# Altium PCB v1_ecg_board.PcbDoc
Units mm, origin at the board's own origin, x right, y up, seen from the top; angles counter-clockwise.
Board outline 26.97 x 70.99 mm, 2 copper layers (Top Layer, Bottom Layer), stack 1.671 mm thick; 39 components, 28 nets, 183 pads, 7 vias.
Unrouted connection lines stored in the file: 1.
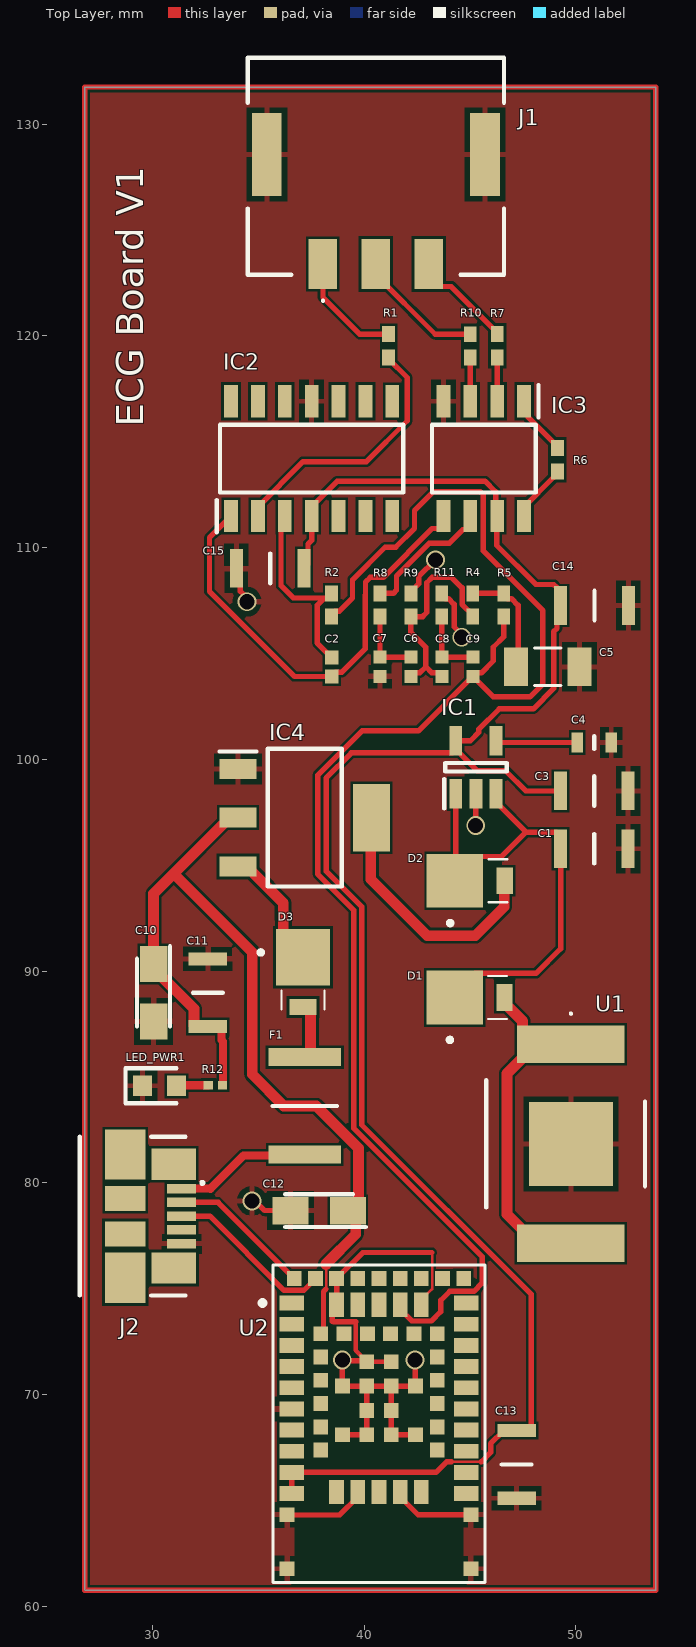
[diagram p0: Top Layer view]
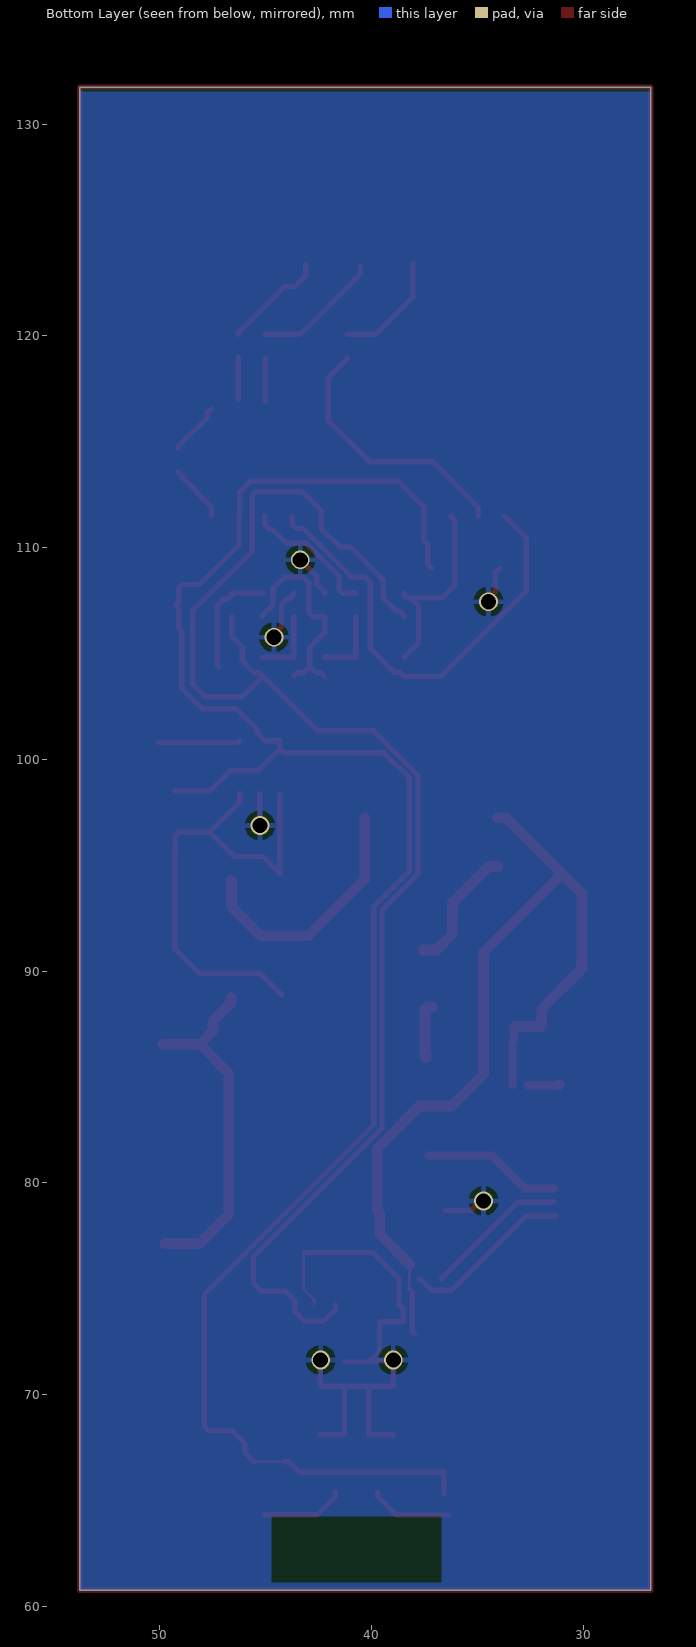
[diagram p1: Bottom Layer view, seen from below]
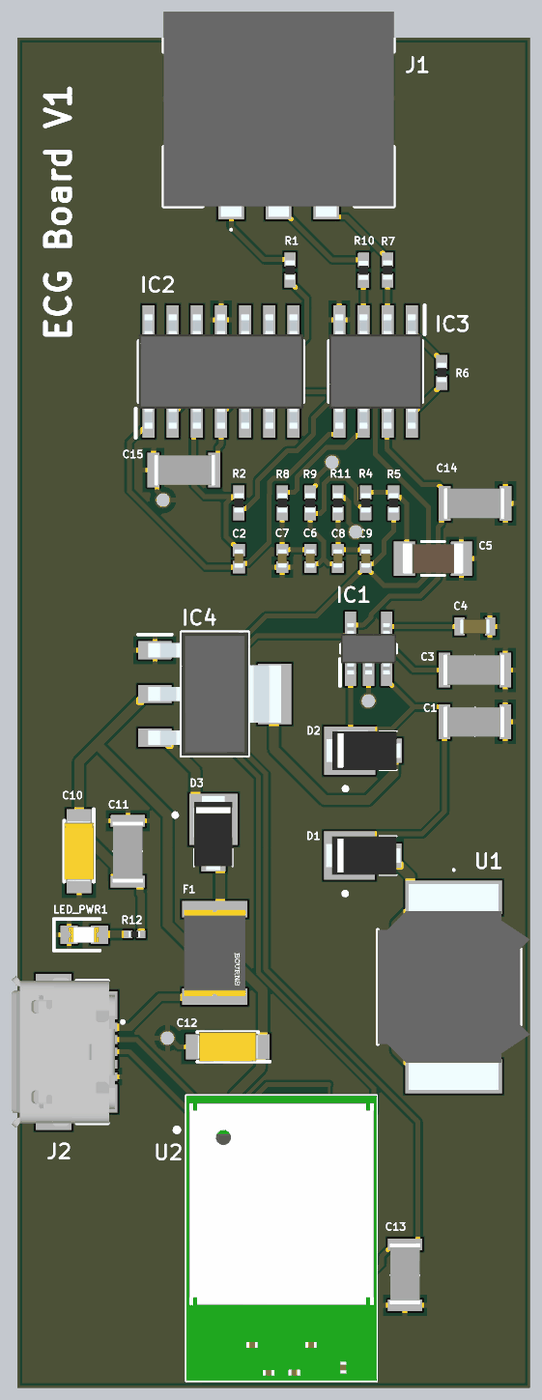
[diagram p2: 3D render of the assembled board from above, using the file's embedded part models]

## Layer stack, top to bottom
Board Layer Stack Top Solder: solder mask 0.0102, SM-001, Dk 3.5
Top Layer: signal copper 0.0356
Dielectric 1: dielectric 1.6002, FR-4, Dk 4.8
Bottom Layer: signal copper 0.0356
Board Layer Stack Bottom Solder: solder mask 0.0102, SM-001, Dk 3.5

## Board outline
26.797,60.757 26.797,131.75 53.772,131.75 53.772,60.757

## Design rules (kind name [scope] priority, off if disabled: settings)
Clearance [All] p1: gap=0.127 ignorepadtopadclearanceinfootprint=FALSE except(0: Arc-Hole Track-Hole SMDPad-Hole THPad-Hole Via-Hole Fill-Hole Poly-Hole Region-Hole Text-Hole; 0.076: Arc-SMDPad Track-SMDPad)
PolygonConnect [All] p1: connectstyle=Relief reliefconductorwidth=0.254 reliefentries=4 polygonreliefangle="90 Angle" airgapwidth=0.254
RoomDefinition instrumentation_amplifier [InComponentClass('instrumentation_amplifier')] p1: confinementstyle=ConfineIn formatcopy=TRUE lockcomponents=FALSE outline 0,0 50.8,0 50.8,25.4 0,25.4
RoutingVias [All] p1: holewidth=0.711 width=1.27 viastyle="Through Hole" minholewidth=0.711 minwidth=1.27 maxholewidth=0.711 maxwidth=1.27
SolderMaskExpansion [All] p1: expansion=0.102 istentingtop=FALSE
Width [All] p1: maxlimit=0.508 minlimit=0.127 preferedwidth=0.254 bottomlayer_minwidth=0.254 bottomlayer_maxwidth=0.254 minimp=50.000000 maximp=50.000000 favimp=50.000000
30 further rules are at their usual default settings.

## Components (designator, comment, footprint, x,y, rotation, side; value= is the part's Value field where it differs from the comment)
C1 "1uF" CAPC3216X180N 50.863,95.777 r0 top
C2 "100pF" CAPC1005X56N 38.456,104.361 r90 top
C3 "1uF" CAPC3216X180N 50.863,98.505 r0 top
C4 "1uF" CAPC1608X90N 50.863,100.793 r0 top
C5 "0.05 uF" CAPC3216X94N 48.666,104.369 r180 top
C6 "0.1 uF" CAPC1005X55N 42.215,104.369 r90 top
C7 "0.1 uF" CAPC1005X55N 40.742,104.369 r90 top
C8 "0.1 uF" CAPC1005X55N 43.666,104.369 r270 top
C9 "0.1 uF" CAPC1005X55N 45.128,104.369 r90 top
C10 "10uF" CAPPM3216X180N 30.048,88.976 r270 top
C11 "1uF" CAPC3216X180N 32.614,88.976 r90 top
C12 "10uF" CAPPM3216X180N 37.871,78.689 r180 top
C13 "1uF" CAPC3216X180N 47.193,66.7 r270 top
C14 "1uF" CAPC3216X180N 50.876,107.264 r0 top
C15 "1uF" CAPC3216X180N 35.56,109.017 r180 top
D1 "SS1P3L-M3_84A" SS1P3LM384A 44.272,88.748 r0 top
D2 "SS1P3L-M3_84A" SS1P3LM384A 44.284,94.265 r0 top
D3 "SS1P3L-M3_84A" SS1P3LM384A 37.109,90.653 r270 top
F1 "MF-MSMF050-2" FUSC4632X85N 37.19,83.629 r270 top
IC1 "TC1185-3.3VCT713" SOT95P270X145-5N 45.275,99.624 r90 top
IC2 "AD8609ARZ-REEL7" SOIC127P600X175-14N 37.516,114.198 r90 top
IC3 "AD627BRZ-R7" SOIC127P600X175-8N 45.644,114.198 r270 top
IC4 "REG1117-5" SOT230P700X180-4N 37.19,97.244 r0 top
J1 "215932-0370" 2159320370 40.549,128.008 r180 top
J2 "Micro_USB_B" 47346-0001 26.563,78.424 r90 top
LED_PWR1 "Green_LED" LEDC1608X55N 30.328,84.582 r0 top
R1 "470kR" RESC1005X40N 41.148,119.532 r90 top
R2 "10kR" RESC1005X40N 38.456,107.29 r90 top
R4 "26kR" RESC1005X40N 45.128,107.29 r90 top
R5 "26kR" RESC1005X40N 46.59,107.29 r270 top
R6 "10kR" RESC1005X40N 49.124,114.148 r270 top
R7 "470kR" RESC1005X40N 46.279,119.532 r270 top
R8 "10kR" RESC1005X40N 40.742,107.29 r270 top
R9 "160kR" RESC1005X40N 42.204,107.29 r270 top
R10 "470kR" RESC1005X40N 45.009,119.524 r270 top
R11 "13K" RESC1005X40N 43.666,107.29 r90 top
R12 "1kR" RESC0603X26N 32.969,84.607 r0 top
U1 "2998" 2998 49.759,81.839 r270 top
U2 "NINA-B306" NINA_LGA71R_1500X1000X223_PCB 40.696,68.623 r270 top

## Footprints (in the part's own frame and the unit in brackets; to place one, negate y for a bottom-side part, rotate by r counter-clockwise, add the part's x,y. Pads: shape width x height; smd on the part's side, far side on the other; paste and mask are expansions set on the pad)
2998 [mm]
  rect 1.78x5.08 smd: 1(-4.7,0) 2(4.7,0)
  rect 3.96x3.96 smd: 3(0,0)
  silkscreen extent -6.2,-4 3,3.5, body extent -5.41,-4 5.41,4, height 3.28
47346-0001 [mm]
  rect 0.45x1.38 smd: 1(1.3,-4.81) 2(0.65,-4.81) 3(0,-4.81) 4(-0.65,-4.81) 5(-1.3,-4.81)
  rect 1.475x2.1 smd: 6(-2.452,-4.45) 7(2.452,-4.45)
  rect 1.175x1.9 smd: 8(0.837,-2.15) 9(-0.837,-2.15)
  rect 2.375x1.9 smd: 10(2.913,-2.15) 11(-2.913,-2.15)
  silkscreen extent -3.75,-5.84 3.75,0, body extent -3.99,-5.38 3.99,0.05, height 2.7
2159320370 [mm]
  rect 1.35x2.38 smd: 1(2.5,4.615) 2(0,4.615) 3(-2.5,4.615)
  rect 1.4x3.92 smd: MP1(5.15,-0.555) MP2(-5.15,-0.555)
  silkscreen extent -6.05,-5.13 6.05,6.4, body extent -6.05,-5.13 6.05,5.67, height 7.6
CAPC1005X55N [mm]
  rect 0.6x0.62 smd: 1(-0.46,0) 2(0.46,0)
  body extent -0.5,-0.25 0.5,0.25, height 0.55
CAPC1005X56N [mm]
  rect 0.65x0.64 smd: 1(-0.45,0) 2(0.45,0)
  body extent -0.5,-0.25 0.5,0.25, height 0.56
CAPC1608X90N [mm]
  rect 0.54x0.94 smd: 1(-0.8,0) 2(0.8,0)
  silkscreen extent 0,-0.3 0,0.3, body extent -0.8,-0.4 0.8,0.4, height 0.9
CAPC3216X94N [mil]
  rect 44x71 smd: 1(-59,0) 2(59,0)
  silkscreen extent -24,-35 24,35, body extent -63,-31 63,31, height 37
CAPC3216X180N [mm]
  rect 0.62x1.82 smd: 1(-1.6,0) 2(1.6,0)
  silkscreen extent 0,-0.7 0,0.7, body extent -1.65,-0.8 1.55,0.8, height 1.6
CAPPM3216X180N [mm]
  rect 1.7x1.3 smd: 1(-1.35,0) 2(1.35,0)
  silkscreen extent -2.2,-0.77 1.6,0.77, body extent -1.6,-0.77 1.6,0.77, height 1.8
FUSC4632X85N [mm]
  rect 0.85x3.43 smd: 1(-2.3,0) 2(2.3,0)
  silkscreen extent 0,-1.52 0,1.52, body extent -2.27,-1.62 2.27,1.62, height 0.85
LEDC1608X55N [mm]
  rect 0.9x0.95 smd: 1(-0.8,0) 2(0.8,0)
  silkscreen extent -1.6,-0.82 0.8,0.82, body extent -0.83,-0.4 0.77,0.4, height 0.55
NINA_LGA71R_1500X1000X223_PCB [mm] "Stand-alone Bluetooth low energy module"
  rect 0.7x1.15 smd paste+0 mask+0.05: 1(-5.7,-4.125) 2(-4.7,-4.125) 3(-3.7,-4.125) 4(-2.7,-4.125) 5(-1.7,-4.125) 6(-0.7,-4.125) 7(0.3,-4.125) 8(1.3,-4.125) 9(2.3,-4.125) 10(3.3,-4.125) 16(3.3,4.125) 17(2.3,4.125) 18(1.3,4.125) 19(0.3,4.125) 20(-0.7,4.125) 21(-1.7,4.125) 22(-2.7,4.125) 23(-3.7,4.125) 24(-4.7,4.125) 25(-5.7,4.125)
  rect 1.15x0.7 smd paste+0 mask+0.05: 11(3.225,-2) 12(3.225,-1) 13(3.225,0) 14(3.225,1) 15(3.225,2) 26(-5.625,2) 27(-5.625,1) 28(-5.625,0) 29(-5.625,-1) 30(-5.625,-2)
  rect 0.7x0.7 smd paste+0 mask+0.05: 31(-4.25,-2.75) 32(-3.15,-2.75) 33(-2.05,-2.75) 34(-0.95,-2.75) 35(0.15,-2.75) 36(1.25,-2.75) 37(1.25,2.75) 38(0.15,2.75) 39(-0.95,2.75) 40(-2.05,2.75) 41(-3.15,2.75) 42(-4.25,2.75) 43(-4.25,1.65) 44(-4.25,0.55) 45(-4.25,-0.55) 46(-4.25,-1.65) 47(-6.85,4) 48(-6.85,3) 49(-6.85,2) 50(-6.85,1) 51(-6.85,0) 52(-6.85,-1) 53(-6.85,-2) 54(-6.85,-3) 55(-6.85,-4) 56(-2.925,-0.575) 57(-2.925,0.575) 58(-1.775,-1.725) 59(-1.775,-0.575) 60(-1.775,0.575) 61(-1.775,1.725) 62(-0.625,-0.575) 63(-0.625,0.575) 64(0.525,-1.725) 65(0.525,-0.575) 66(0.525,0.575) 67(0.525,1.725) 68(4.3,-4.35) 69(6.85,-4.35) 70(6.85,4.35) 71(4.3,4.35)
  Multi-Layer pour cut-out: 4.4,4 7.5,4 7.5,-4 4.4,-4
  silkscreen extent -7.5,-5.6 7.5,5, body extent -7.5,-5 7.5,5, height 2.31
RESC0603X26N [mm]
  rect 0.44x0.42 smd: 1(-0.34,0) 2(0.34,0)
  body extent -0.3,-0.15 0.3,0.15, height 0.26
RESC1005X40N [mm]
  rect 0.75x0.6 smd: 1(-0.55,0) 2(0.55,0)
  body extent -0.5,-0.25 0.5,0.25, height 0.4
SOIC127P600X175-8N [mm]
  rect 1.525x0.65 smd: 1(-2.712,1.905) 2(-2.712,0.635) 3(-2.712,-0.635) 4(-2.712,-1.905) 5(2.712,-1.905) 6(2.712,-0.635) 7(2.712,0.635) 8(2.712,1.905)
  silkscreen extent -3.47,-2.45 1.6,2.58, body extent -3,-2.45 3,2.45, height 1.75
SOIC127P600X175-14N [mm]
  rect 1.525x0.65 smd: 1(-2.712,3.81) 2(-2.712,2.54) 3(-2.712,1.27) 4(-2.712,0) 5(-2.712,-1.27) 6(-2.712,-2.54) 7(-2.712,-3.81) 8(2.712,-3.81) 9(2.712,-2.54) 10(2.712,-1.27) 11(2.712,0) 12(2.712,1.27) 13(2.712,2.54) 14(2.712,3.81)
  silkscreen extent -3.47,-4.33 1.6,4.48, body extent -3,-4.33 3,4.33, height 1.75
SOT95P270X145-5N [mm]
  rect 1.4x0.6 smd: 1(-1.25,0.95) 2(-1.25,0) 3(-1.25,-0.95) 4(1.25,-0.95) 5(1.25,0.95)
  silkscreen extent -1.95,-1.45 0.2,1.5, body extent -1.35,-1.45 1.35,1.45, height 1.45
SOT230P700X180-4N [mm]
  rect 1.75x0.95 smd: 1(-3.15,2.3) 2(-3.15,0) 3(-3.15,-2.3)
  rect 1.75x3.2 smd: 4(3.15,0)
  silkscreen extent -4.03,-3.25 1.75,3.25, body extent -3.5,-3.25 3.5,3.25, height 1.8
SS1P3LM384A [mm]
  rect 2.67x2.54 smd: 1(0,0)
  rect 0.762x1.27 smd: 2(2.351,0)
  silkscreen extent -0.33,-2.1 2.47,1.01, body extent -1.22,-1.02 2.68,1.02, height 1.15

## Part data
C1 C3 C11 C13 C14 C15: library part C3216X7R1H105K160AE, "Capacitor", Manufacturer_Name=TDK, Mouser Part Number=810-C3216X7R1H105KST, Arrow Part Number=C3216X7R1H105K160AE, Arrow Price/Stock=https://www.arrow.com/en/products/c3216x7r1h105k160ae/tdk?region=nac, Datasheet Link=https://product.tdk.com/info/en/catalog/datasheets/mlcc_commercial_midvoltage_en.pdf, Height=1.8mm, Manufacturer_Part_Number=C3216X7R1H105K160AE, Mouser Price/Stock=https://www.mouser.co.uk/ProductDetail/TDK/C3216X7R1H105K160AE?qs=LcTL%2F5vFEzHWgMW0Em18fQ%3D%3D
C2: library part 04025A101JAT2A, "Capacitor", Manufacturer_Name=AVX, Mouser Part Number=581-04025A101J, Arrow Part Number=04025A101JAT2A, Arrow Price/Stock=https://www.arrow.com/en/products/04025a101jat2a/avx, Datasheet Link=http://www.mouser.com/catalog/supplier/library/pdf/AVXSurfaceMountCeramic.pdf, Height=0.56mm, Manufacturer_Part_Number=04025A101JAT2A, Mouser Price/Stock=https://www.mouser.co.uk/ProductDetail/AVX/04025A101JAT2A?qs=MeUoP7zHHrVUMjmeFYUrCw%3D%3D
C4: library part CGA1A2X7R1H471K030BA, "Capacitor", Manufacturer_Name=TDK, Mouser Part Number=810-CGA1A2X7R1H471KA, Arrow Part Number=CGA1A2X7R1H471K030BA, Arrow Price/Stock=https://www.arrow.com/en/products/cga1a2x7r1h471k030ba/tdk?region=europe, Datasheet Link=https://product.tdk.com/system/files/dam/doc/product/capacitor/ceramic/mlcc/catalog/mlcc_automotive_general_en.pdf, Height=0.9mm, Manufacturer_Part_Number=CGA1A2X7R1H471K030BA, Mouser Price/Stock=https://www.mouser.co.uk/ProductDetail/TDK/CGA1A2X7R1H471K030BA?qs=2FIyTMJ0hNm9jc1ZvmiYZg%3D%3D
C5: library part 12065C503JAT2A, "Capacitor", Manufacturer_Name=AVX, Mouser Part Number=581-12065C503JAT2A, Arrow Part Number=12065C503JAT2A, Arrow Price/Stock=https://www.arrow.com/en/products/12065c503jat2a/avx, Manufacturer_Part_Number=12065C503JAT2A, Mouser Price/Stock=https://www.mouser.co.uk/ProductDetail/AVX/12065C503JAT2A?qs=KpoduxKdAk0Ka0q%2FwvgHUg%3D%3D
C6 C7 C8 C9: library part CL05A104KA5NNNC, "Capacitor", Manufacturer_Name=SAMSUNG, Mouser Part Number=187-CL05A104KA5NNNC, Arrow Part Number=CL05A104KA5NNNC, Arrow Price/Stock=https://www.arrow.com/en/products/cl05a104ka5nnnc/samsung-electro-mechanics?region=europe, Datasheet Link=https://datasheet.datasheetarchive.com/originals/distributors/Datasheets-DGA10/2409293.pdf, Height=0.55mm, Manufacturer_Part_Number=CL05A104KA5NNNC, Mouser Price/Stock=https://www.mouser.co.uk/ProductDetail/Samsung-Electro-Mechanics/CL05A104KA5NNNC?qs=X6jEic%2FHinDlkqz9npJeOg%3D%3D
C10 C12: library part TAJA106K010RNJV, "Capacitor Polarised", Manufacturer_Name=AVX, Mouser Part Number=581-TAJA106K010RNJV, Arrow Part Number=TAJA106K010RNJV, Arrow Price/Stock=https://www.arrow.com/en/products/taja106k010rnjv/avx, Datasheet Link=http://www.farnell.com/datasheets/1680476.pdf, Height=1.8mm, Manufacturer_Part_Number=TAJA106K010RNJV, Mouser Price/Stock=https://www.mouser.co.uk/ProductDetail/AVX/TAJA106K010RNJV?qs=q%252BHV0zBR8MhA8vzi7uQCHA%3D%3D
D1 D2 D3: "Schottky Diode", Arrow Part Number=SS1P3L-M3/84A, Manufacturer_Name=Vishay, Mouser Part Number=625-SS1P3L-M3/84A, Arrow Price/Stock=https://www.arrow.com/en/products/ss1p3l-m384a/vishay?region=nac, Datasheet Link=https://ms.componentsearchengine.com/Datasheets/2/SS1P3L-M3_84A.pdf, Height=1.15mm, Manufacturer_Part_Number=SS1P3L-M3/84A, Mouser Price/Stock=https://www.mouser.co.uk/ProductDetail/Vishay-General-Semiconductor/SS1P3L-M3-84A?qs=HSPD0Bff7iZtYrbeCvAZDQ%3D%3D
F1: "Fuse", Manufacturer_Name=Bourns, Mouser Part Number=652-MF-MSMF050-2, Arrow Part Number=MF-MSMF050-2, Arrow Price/Stock=https://www.arrow.com/en/products/mf-msmf050-2/bourns?region=europe, Datasheet Link=https://www.bourns.com/pdfs/mfmsmf.pdf, Manufacturer_Part_Number=MF-MSMF050-2, Mouser Price/Stock=https://www.mouser.co.uk/ProductDetail/Bourns/MF-MSMF050-2?qs=t3shhpq1i1DZ7OBD5kLNoA%3D%3D
IC1: "Integrated Circuit", Manufacturer_Name=Microchip, Mouser Part Number=579-TC1185-3.3VCT713, Arrow Part Number=TC1185-3.3VCT713, Arrow Price/Stock=https://www.arrow.com/en/products/tc1185-3.3vct713/microchip-technology?region=nac, Datasheet Link=https://datasheet.datasheetarchive.com/originals/distributors/SFDatasheet-4/sf-00090228.pdf, Height=1.45mm, Manufacturer_Part_Number=TC1185-3.3VCT713, Mouser Price/Stock=https://www.mouser.co.uk/ProductDetail/Microchip-Technology-Atmel/TC1185-3.3VCT713?qs=L7mmR9vWTYjv9mdvONI4tQ%3D%3D
IC2: "Integrated Circuit", Manufacturer_Name="Analog Devices", Mouser Part Number=584-AD8609ARZ-R7, Arrow Part Number=AD8609ARZ-REEL7, Arrow Price/Stock=https://www.arrow.com/en/products/ad8609arz-reel7/analog-devices, Datasheet Link=https://www.analog.com/media/en/technical-documentation/data-sheets/AD8603_8607_8609.pdf, Height=1.75mm, Manufacturer_Part_Number=AD8609ARZ-REEL7, Mouser Price/Stock=https://www.mouser.com/Search/Refine.aspx?Keyword=584-AD8609ARZ-R7
IC3: "Integrated Circuit", Manufacturer_Name="Analog Devices", Mouser Part Number=584-AD627BRZ-R7, Arrow Part Number=AD627BRZ-R7, Arrow Price/Stock=https://www.arrow.com/en/products/ad627brz-r7/analog-devices, Datasheet Link=https://www.analog.com/media/en/technical-documentation/data-sheets/AD627.pdf, Height=1.75mm, Manufacturer_Part_Number=AD627BRZ-R7, Mouser Price/Stock=https://www.mouser.co.uk/ProductDetail/Analog-Devices/AD627BRZ-R7?qs=NmRFExCfTkFC5ODcpQAx7A%3D%3D
IC4: "Integrated Circuit", Manufacturer_Name="Texas Instruments", Mouser Part Number=595-REG1117-5, Arrow Part Number=REG1117-5, Arrow Price/Stock=https://www.arrow.com/en/products/reg1117-5/texas-instruments?region=nac, Datasheet Link=http://www.ti.com/lit/gpn/reg1117, Height=1.8mm, Manufacturer_Part_Number=REG1117-5, Mouser Price/Stock=https://www.mouser.co.uk/ProductDetail/Texas-Instruments/REG1117-5?qs=sSOk4GDDv7yzZiRJiNDqvA%3D%3D
J1: "Connector", Manufacturer_Name=Molex, Mouser Part Number=538-215932-0370, Datasheet Link=https://www.molex.com/pdm_docs/sd/2159320370_sd.pdf, Height=7.5mm, Manufacturer_Part_Number=215932-0370, Mouser Price/Stock=https://www.mouser.co.uk/ProductDetail/Molex/215932-0370?qs=t7xnP681wgWm2CraYd21hQ%3D%3D
J2: library part 47346-0001, "Connector", Manufacturer_Name=Molex, Mouser Part Number=538-47346-0001, Datasheet Link=http://www.molex.com/pdm_docs/sd/473460001_sd.pdf, Manufacturer_Part_Number=47346-0001, Mouser Price/Stock=https://www.mouser.co.uk/ProductDetail/Molex/47346-0001?qs=c2CV6XM0DweJBWaSeyWeCw%3D%3D
LED_PWR1: library part LTST-C191KGKT, "LED", Manufacturer_Name=Lite-On, Mouser Part Number=859-LTST-C191KGKT, Arrow Part Number=LTST-C191KGKT, Arrow Price/Stock=https://www.arrow.com/en/products/ltst-c191kgkt/lite-on-technology?region=nac, Datasheet Link=http://www.mouser.com/ds/2/239/S_110_LTST-C191KGKT-369560.pdf, Height=0.55mm, Manufacturer_Part_Number=LTST-C191KGKT, Mouser Price/Stock=https://www.mouser.co.uk/ProductDetail/Lite-On/LTST-C191KGKT?qs=xSPZu9B1aMCRQ5ACasEYAg%3D%3D
R1 R2 R6 R7 R8 R10: library part RC0402JR-0710KL, "Resistor", Manufacturer_Name=KEMET, Mouser Part Number=603-RC0402JR-0710KL, Datasheet Link=https://datasheet.datasheetarchive.com/originals/distributors/Datasheets_SAMA/902f9e387b938f871d31120f5fc1d65e.pdf, Height=0.4mm, Manufacturer_Part_Number=RC0402JR-0710KL, Mouser Price/Stock=https://www.mouser.co.uk/ProductDetail/YAGEO/RC0402JR-0710KL?qs=V1yeUXFNrkk4BhFptVo0Rw%3D%3D
R4 R5: library part RC0402FR-0726K1L, "Resistor", Manufacturer_Name=KEMET, Mouser Part Number=603-RC0402FR-0726K1L, Arrow Part Number=RC0402FR-0726K1L, Arrow Price/Stock=https://www.arrow.com/en/products/rc0402fr-0726k1l/yageo, Datasheet Link=http://www.yageo.com/documents/recent/PYu-RC0402_51_RoHS_L_6_r.pdf, Height=0.4mm, Manufacturer_Part_Number=RC0402FR-0726K1L, Mouser Price/Stock=https://www.mouser.co.uk/ProductDetail/Yageo/RC0402FR-0726K1L?qs=UOUeRUa%252B8WmXNUY%252B%252Bz4L%252Bg%3D%3D
R9: library part RC0402FR-07160KL, "Resistor", Manufacturer_Name=KEMET, Mouser Part Number=603-RC0402FR-07160KL, Arrow Part Number=RC0402FR-07160KL, Arrow Price/Stock=https://www.arrow.com/en/products/rc0402fr-07160kl/yageo, Datasheet Link=http://www.yageo.com/documents/recent/PYu-RC0402_51_RoHS_L_6_r.pdf, Height=0.4mm, Manufacturer_Part_Number=RC0402FR-07160KL, Mouser Price/Stock=https://www.mouser.co.uk/ProductDetail/Yageo/RC0402FR-07160KL?qs=UOUeRUa%252B8WnrOUuDcgqW7w%3D%3D
R11: library part RC0402FR-0713KL, "Resistor", Manufacturer_Name=KEMET, Arrow Part Number=RC0402FR-0713KL, Arrow Price/Stock=https://www.arrow.com/en/products/rc0402fr-0713kl/yageo, Datasheet Link=http://www.yageo.com/documents/recent/PYu-RC0402_51_RoHS_L_6_r.pdf, Height=0.4mm, Manufacturer_Part_Number=RC0402FR-0713KL
R12: library part RC0201FR-071KL, "Resistor", Manufacturer_Name=KEMET, Mouser Part Number=603-RC0201FR-071KL, Datasheet Link=http://www.yageo.com/documents/recent/PYu-RC0201_51_RoHS_L_8.pdf, Height=0.26mm, Manufacturer_Part_Number=RC0201FR-071KL, Mouser Price/Stock=https://www.mouser.co.uk/ProductDetail/YAGEO/RC0201FR-071KL?qs=FLc6udek5PTmPyT6HHV8wg%3D%3D
U1: "Undefined or Miscellaneous", Manufacturer_Name="Keystone Electronics", Mouser Part Number=534-2998, Arrow Part Number=2998, Arrow Price/Stock=https://www.arrow.com/en/products/2998/keystone-electronics, Datasheet Link=https://www.keyelco.com/product-pdf.cfm?p=763, Height=3.18mm, Manufacturer_Part_Number=2998, Mouser Price/Stock=https://www.mouser.co.uk/ProductDetail/Keystone-Electronics/2998?qs=xAjc%252BIZFyb5TvOJRv3Vy6w%3D%3D
U2: "u-blox NINA-B306 Bluetooth 5 LE, 802.15.4 module", Manufacturer=u-blox, Part Description="Stand-alone Bluetooth low energy module"

## Via types
v1: diameter 0.889/0.889 (per signal layer), hole 0.711, Top Layer to Bottom Layer, tented both sides, 7 vias

## Nets (pads, with @x,y where several pads share a name; then routed paths per layer and width w, separated by ;. In a path a pad name is that pad's centre, name@x,y a point inside that pad or via, vN(x,y) a via of type N, cw(c..) or ccw(c..) an arc to the next point about the centre after c; other vN are vias at no path point)
5V_USB: C10.1 C11.1 C12.1 D2.2 IC4.2 IC4.4 R12.2 U2.31 | length 55.7
  Top Layer w0.127: 38.196,74.986 38.202,74.992 38.202,75.971 38.196,75.977 38.196,76.14
  Top Layer w0.254: U2.31 38.075,73.002 38.075,74.865 38.196,74.986
  Top Layer w0.381: C11.1@33.254,87.32 33.254,86.735 33.325,86.665 R12.2@33.325,84.623
  Top Layer w0.508: C10.1@30.074,90.152 C10.1@30.074,90.322 ; 31.025,94.57 34.708,90.887 34.708,85.121 36.2,83.629 37.732,83.629 39.726,81.636 39.726,78.689 39.602,78.565 39.602,77.575 38.196,76.169 38.196,76.14 ; C11.1@32.537,87.376 32.014,87.376 31.958,87.432 31.958,88.217 30.048,90.126 C10.1 30.048,93.652 33.64,97.244 IC4.2 ; C11.1 33.198,87.376 C11.1@33.254,87.32 ; IC4.4@40.31,97.244 40.31,94.336 42.977,91.669 45.237,91.669 46.609,93.04 46.609,94.239 D2.2
GND: C1.2 C3.2 C4.2 C5.1 C7.1 C10.2 C11.2 C12.2 C13.2 C14.2 C15.2 IC1.2 IC2.11 IC3.4 IC4.1 J1.MP1 J1.MP2 J2.5 LED_PWR1.1 R9.1 R11.2 U1.3 U2.6 U2.12 U2.14 U2.26 U2.30 U2.53 U2.56 U2.57 U2.58 U2.59 U2.60 U2.61 U2.62 U2.63 U2.64 U2.65 U2.66 U2.67 U2.68 U2.69 U2.70 U2.71 | length 45.7
  Top Layer w0.127: U2.26 42.696,74.473 43.205,74.983 43.205,76.683 43.18,76.708
  Top Layer w0.203: 39.599,73.431 39.599,72.085 39.872,71.811 39.872,71.797 U2.56@40.081,71.588 ; U2.56 U2.57
  Top Layer w0.254: C15.2@33.96,108.991 34.143,108.808 34.143,107.939 34.468,107.614 v1(34.468,107.442) ; v1@34.671,79.172 34.808,79.172 35.29,78.689 C12.2 ; U2.68@36.373,64.313 38.835,64.313 39.696,65.173 U2.12 ; 38.496,73.457 38.496,74.048 U2.30 U2.53 39.93,76.708 43.18,76.708 ; 38.532,73.457 38.557,73.431 39.599,73.431 ; U2.58@38.964,70.409 38.967,70.412 v1@38.967,71.624 ; v1(38.964,71.628) v1@38.967,71.624 ; U2.64 40.108,68.098 U2.65@40.132,68.123 ; U2.58 U2.59 ; U2.56@40.081,71.588 39.003,71.588 v1@38.967,71.624 ; U2.65@40.121,68.123 U2.62 U2.59 ; U2.14 41.696,65.173 42.546,64.323 45.024,64.323 U2.71@45.034,64.313 ; R9.1 42.204,107.915 42.57,108.281 42.57,108.636 v1(43.358,109.423) ; U2.61@42.378,70.398 U2.60 ; U2.61@42.393,70.434 42.407,70.448 42.407,71.614 v1(42.393,71.628) ; U2.67@42.443,68.123 42.419,68.098 U2.66 U2.63 U2.60 ; R11.2 43.666,107.765 43.839,107.592 43.97,107.592 44.244,107.318 44.244,106.26 44.602,105.902 v1(44.602,105.766) ; U2.71@45.034,64.323 U2.71 ; v1(45.263,96.876) 45.269,96.882 45.269,98.369 IC1.2 ; U2.59 U2.60
  other v1: 34.696,79.146
GPIO_27/P0.05: C9.1 R2.1 R5.2 U2.27 | length 70.1
  Top Layer w0.254: R2.1 38.456,106.815 38.629,106.988 38.817,106.988 39.445,107.616 39.445,108.476 40.991,110.021 41.487,110.021 42.372,110.906 42.372,111.745 43.256,112.63 45.492,112.63 45.622,112.5 45.622,109.842 48.438,107.026 48.438,103.556 47.828,102.946 46.1,102.946 C9.1@45.16,103.886 ; U2.27 41.696,74.023 42.249,73.47 43.168,73.47 43.612,73.914 43.612,74.451 44.037,74.877 45.184,74.877 45.568,75.26 45.568,76.512 39.497,82.583 39.497,92.882 37.795,94.584 37.795,99.243 39.894,101.342 42.552,101.342 45.118,103.909 C9.1 ; C9.1@45.136,103.911 45.306,104.082 45.53,104.082 46.093,104.645 46.093,105.293 46.59,105.79 R5.2
Ground_ECG: J1.1 R1.2 | length 5.4
  Top Layer w0.254: J1.1 38.049,121.818 39.785,120.082 R1.2
Left_ECG: J1.2 R10.1 | length 6
  Top Layer w0.254: J1.2@40.513,123.292 40.513,122.914 43.354,120.074 R10.1
NetC1_1: C1.1 D1.1 D2.1 IC1.1 IC1.3 | length 23.3
  Top Layer w0.254: D1.1@44.221,88.875 45.237,89.891 48.114,89.891 49.276,91.053 49.276,95.699 C1.1@49.262,95.713 ; D2.1@44.309,94.595 D2.1@44.325,94.61 ; IC1.1@44.309,98.38 44.325,98.365 D2.1@44.325,94.61 ; IC1.3@46.214,98.405 46.214,97.985 47.639,96.56 ; C1.1 49.263,96.377 49.08,96.56 47.639,96.56 ; D2.1@44.325,94.61 45.122,95.408 46.487,95.408 47.639,96.56
NetC2_2: C2.2 IC2.3 R2.2 | length 9.3
  Top Layer w0.254: IC2.3 36.068,111.309 36.068,108.204 36.652,107.62 38.094,107.62 38.283,107.62 38.456,107.793 R2.2 ; 38.094,107.592 37.775,107.272 37.775,105.497 38.456,104.816 C2.2
NetC4_1: C4.1 IC1.4 | length 3.9
  Top Layer w0.254: IC1.4 46.306,100.793 C4.1@50.05,100.793
NetC5_2: C5.2 R4.2 R5.1 | length 5.4
  Top Layer w0.254: R4.2 R5.1@46.567,107.84 ; R5.1 46.59,107.765 46.763,107.592 46.952,107.592 47.271,107.272 47.271,104.421 C5.2@47.193,104.343
NetC6_1: C6.1 C8.2 R4.1 R9.2 | length 10.3
  Top Layer w0.254: C6.1@42.215,103.911 42.385,104.082 42.617,104.082 42.906,104.371 ; C8.2@43.663,103.937 43.518,104.082 43.195,104.082 42.906,104.371 ; R4.1@45.136,106.756 45.136,106.807 44.625,107.318 44.625,108.095 44.124,108.596 43.208,108.596 42.951,108.339 42.951,106.934 42.757,106.74 R9.2 42.204,105.984 42.552,105.635 42.557,105.635 42.906,105.286 42.906,104.371
NetC6_2: C6.2 C7.2 R8.2 | length 3.4
  Top Layer w0.254: R8.2 C7.2 42.192,104.829 C6.2@42.215,104.851
NetC8_1: C8.1 C9.2 R11.1 | length 3.4
  Top Layer w0.254: R11.1 C8.1 C9.2 45.133,104.829 C9.2@45.136,104.826
NetD1_2: D1.2 U1.1 U1.2 | length 16.7
  Top Layer w0.508: D1.2 46.623,88.494 47.473,87.644 47.473,87.175 U1.1@48.109,86.539 ; U1.2 48.109,77.139 46.736,78.511 46.736,85.166 U1.1@48.109,86.539 ; U1.1@49.835,86.538 48.11,86.538 U1.1@48.109,86.539
NetD3_2: D3.2 F1.1 | length 2.7
  Top Layer w0.508: D3.2 37.338,88.302 37.465,88.175 37.465,86.1 37.419,86.054 F1.1@37.419,85.915
NetF1_2: F1.2 J2.1 | length 6.5
  Top Layer w0.381: J2.1 32.722,79.724 32.741,79.705 ; 32.766,79.756 34.303,81.293 F1.2@37.299,81.293
NetIC2_2: IC2.2 R1.1 | length 12.6
  Top Layer w0.254: IC2.2@34.95,111.481 34.95,111.898 37.108,114.056 40.098,114.056 42.032,115.99 42.032,118.024 41.148,118.907 R1.1
NetIC3_1: IC3.1 R6.1 | length 2.5
  Top Layer w0.254: IC3.1@47.549,116.535 47.747,116.337 47.747,116.149 49.124,114.773 R6.1
NetIC3_2: IC3.2 R7.2 | length 2
  Top Layer w0.254: IC3.2@46.279,116.992 R7.2
NetIC3_3: IC3.3 R10.2 | length 2.1
  Top Layer w0.254: IC3.3@44.983,116.916 45.009,116.942 R10.2
NetIC3_6: IC3.6 R8.1 | length 6.5
  Top Layer w0.254: R8.1 41.374,107.84 41.523,107.988 41.523,108.655 43.078,110.211 44.018,110.211 44.658,110.851 44.811,110.851 45.034,111.074 IC3.6@45.034,111.506
NetIC3_8: IC3.8 R6.2 | length 2.8
  Top Layer w0.254: IC3.8 47.549,111.924 48.951,113.326 48.951,113.416 R6.2@49.124,113.589
NetLED_PWR1_2: LED_PWR1.2 R12.1 | length 1.5
  Top Layer w0.381: LED_PWR1.2@31.166,84.607 R12.1
  Top Layer w0.508: LED_PWR1.2@31.14,84.633 LED_PWR1.2@31.166,84.607
OUT_A: C2.1 IC2.1 IC3.5 | length 21.8
  Top Layer w0.254: IC2.1 32.69,110.47 32.69,107.925 36.703,103.911 C2.1 ; C2.1@38.506,103.963 38.506,103.967 38.649,104.109 38.933,104.109 40.051,105.227 40.051,107.742 40.061,107.752 40.061,108.372 40.284,108.596 40.905,108.596 43.208,110.899 43.541,110.899 43.739,111.097 IC3.5
Right_ECG: J1.3 R7.1 | length 4.9
  Top Layer w0.254: J1.3@43.104,123.368 43.104,122.824 43.597,122.33 44.106,122.33 46.279,120.157 R7.1
USB_DM: J2.2 U2.55 | length 6.8
  Top Layer w0.254: J2.2@31.394,79.096 31.417,79.073 33.096,79.073 36.689,75.48 U2.55@36.689,75.469
USB_DP: J2.3 U2.54 | length 8.1
  Top Layer w0.254: J2.3@31.318,78.435 31.33,78.423 32.706,78.423 36.209,74.92 37.143,74.92 37.666,75.444 U2.54@37.705,75.444
VCC: C3.1 C13.1 C14.1 C15.1 IC1.5 IC2.4 IC3.7 U2.9 U2.10 | length 90
  Top Layer w0.127: 44.108,66.823 45.533,66.823
  Top Layer w0.254: U2.10 U2.9 43.383,66.323 43.883,66.823 44.108,66.823 ; C15.1 37.343,109.2 37.343,110.17 37.516,110.343 IC2.4 37.516,111.924 38.73,113.138 45.702,113.138 46.21,112.63 IC3.7@46.21,111.575 ; IC1.5@44.386,100.413 45.344,99.455 46.682,99.455 47.633,98.505 C3.1 ; 45.533,66.823 45.972,67.262 45.972,67.679 46.593,68.3 C13.1 ; IC3.7@46.253,111.469 46.253,110.109 48.108,108.255 48.944,108.255 49.093,108.106 49.093,107.422 49.251,107.264 49.104,107.117 49.104,106.186 48.946,106.028 48.946,103.345 47.984,102.383 46.374,102.383 45.413,101.422 45.413,101.281 45.006,100.874 IC1.5 44.325,100.474 44.152,100.301 39.392,100.301 38.202,99.111 38.202,94.717 39.878,93.04 39.878,82.74 47.879,74.739 47.879,68.483 47.696,68.301 C13.1@47.295,68.301
VUSB: D3.1 IC4.3 | length 6
  Top Layer w0.508: IC4.3 34.44,94.944 36.17,93.214 36.17,92.393 36.176,92.386 36.176,91.734 36.915,90.995 D3.1@37.567,90.995
pads on no net: IC2.5 IC2.6 IC2.7 IC2.8 IC2.9 IC2.10 IC2.12 IC2.13 IC2.14 J2.4 J2.6 J2.7 J2.8 J2.9 J2.10 J2.11 U2.1 U2.2 U2.3 U2.4 U2.5 U2.7 U2.8 U2.11 U2.13 U2.15 U2.16 U2.17 U2.18 U2.19 U2.20 U2.21 U2.22 U2.23 U2.24 U2.25 U2.28 U2.29 U2.32 U2.33 U2.34 U2.35 U2.36 U2.37 U2.38 U2.39 U2.40 U2.41 U2.42 U2.43 U2.44 U2.45 U2.46 U2.47 U2.48 U2.49 U2.50 U2.51 U2.52
copper on no net: | length 195.9
  Top Layer w0.254: 26.797,60.757 53.772,60.757 53.772,131.75 26.797,131.75 26.797,60.757

## Polygon pours and split planes (outlines as drawn)
GND on Bottom Layer "NONET_L-01_P-001" (solid, pour order 1): 26.797,131.521 53.772,131.521 53.772,60.782 26.797,60.782
no net on Board Layer Stack Bottom Solder "NONET_L-01_P-001" (solid): 26.797,131.75 26.797,60.757 53.772,60.757 53.772,131.75
GND on Top Layer "NONET_L-01_P-001" (solid, pour order 0): 26.797,131.775 53.772,131.775 53.772,60.782 26.797,60.782

## Silkscreen, mask and mechanical layers (free items; w line width, h text height)
Top Overlay:
  text "ECG Board V1" at 29.566,115.697 h1.27 r90

## Dimensions
26.797,60.757 to 26.797,131.75 on Mechanical 1
26.797,60.757 to 53.772,60.757 on Mechanical 1